# EAGLE board attiny_cortana_slot_connector (EAGLE 7.7.0)
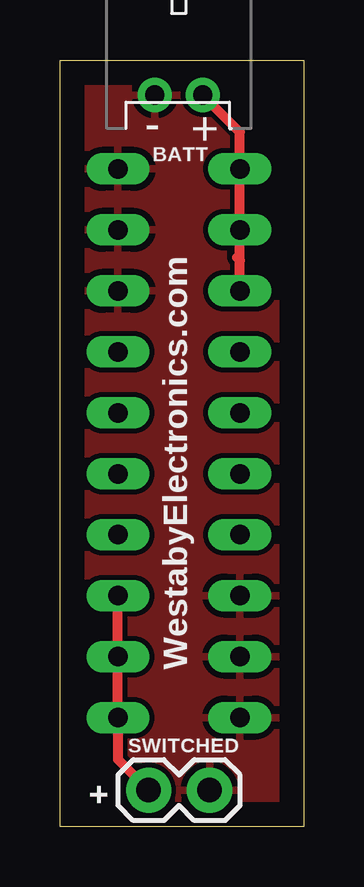
[diagram p0: board, top side]
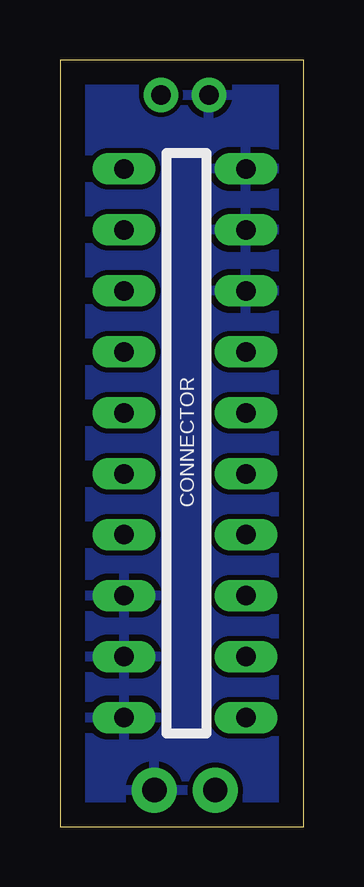
[diagram p1: board, bottom side, seen from below]

Size 10.16 x 31.94 mm. Coordinates in mm from the lower left corner, seen from the top.
Outline: 0,0 0,31.94 10.16,31.94 10.16,0 0,0
Copper layers (1*16): Top 0.035mm / dielectric 1.5mm / Bottom 0.035mm
Design rules "default *": minimum track width 10mil, minimum drill 24mil, track to track 8mil, track to pad 8mil, pad to pad 8mil, via to via 8mil, smd to smd 8mil, copper to edge 40mil, drill to drill 8mil, minimum pad ring 10mil, minimum via ring 8mil, stop-mask expansion 4mil, vias tented up to drill 25mil, thermal gap 10mil

## Footprints (pad centres in the part's own frame; a part is rotated, then mirrored left to right if it is on the bottom)
JST-PH-2-THM-RA = drill 0.8 pad 1.422: 1 1,0; 2 -1,0
1X02 = drill 1.016 pad 1.88: 1 0,0; 2 2.54,0
2X10_NOSILK = drill 0.813 long: 1 -11.43,-1.905; 2 -11.43,3.175; 3 -8.89,-1.905; 4 -8.89,3.175; 5 -6.35,-1.905; 6 -6.35,3.175; 7 -3.81,-1.905; 8 -3.81,3.175; 9 -1.27,-1.905; 10 -1.27,3.175; 11 1.27,-1.905; 12 1.27,3.175; 13 3.81,-1.905; 14 3.81,3.175; 15 6.35,-1.905; 16 6.35,3.175; 17 8.89,-1.905; 18 8.89,3.175; 19 11.43,-1.905; 20 11.43,3.175

## Placement (x,y rotation side)
CN1  [JST-PH-2-THM-RA]  4.95,30.48 0 top
JP1  [1X02]  6.23,1.52 180 top
U$1  M10X2_NOSILK  [2X10_NOSILK]  4.32,15.97 90 bottom

## Library data of the parts
CN1 = adafruit
JP1 = SparkFun
U$1 = dustin

## Nets
GND_B: CN1.2 JP1.1 U$1.2 U$1.4 U$1.6 U$1.15 U$1.17 U$1.19
SWITCH: JP1.2 U$1.1 U$1.3 U$1.5
VCC_B: CN1.1 U$1.16 U$1.18 U$1.20

## Tracks (layer width: path | path; a pad name or v marks a point on that pad's centre or on a via)
GND_B
  pour Bottom: 0,0 0,31.94 10.16,31.94 10.16,0
  pour Top: 0,0 0,31.94 10.16,31.94 10.16,0
SWITCH
  Top 0.406: U$1.5 U$1.3 U$1.1 2.41,2.8 JP1.2
VCC_B
  Top 0.406: U$1.16 7.49,23.59 | 7.49,23.59 U$1.18 U$1.20 7.49,28.94 CN1.1 | 7.49,23.59 7.37,23.72

## Text on the board
tPlace: BATT | WestabyElectronics.com | SWITCHED | +
bPlace: CONNECTOR
tStop: 08_21